# EAGLE board v1 (EAGLE 6.5.0)

Size 101.27 x 80 mm. Coordinates in mm from the lower left corner, seen from the top.
Outline: 0,0 101.27,0 101.27,80 0,80 0,0
Copper layers (1*16): Top 0.035mm / dielectric 1.5mm / Bottom 0.035mm
Design rules "default": minimum track width 10mil, minimum drill 24mil, track to track 8mil, track to pad 8mil, pad to pad 8mil, via to via 8mil, smd to smd 8mil, copper to edge 40mil, drill to drill 8mil, minimum pad ring 10mil, minimum via ring 8mil, stop-mask expansion 4mil, vias tented up to drill 0mil, thermal gap 10mil

## Footprints (pad centres in the part's own frame; a part is rotated, then mirrored left to right if it is on the bottom)
CPOL-RADIAL-100UF-25V = drill 0.7 pad 1.651 square: 1 1.27,0 | drill 0.7 pad 1.651: 2 -1.27,0
ATX24_RIGHT_ANGLE = drill 1.8 pad 2.9: 1 23.1,4.76; 2 18.9,4.76; 3 14.7,4.76; 4 10.5,4.76; 5 6.3,4.76; 6 2.1,4.76; 7 -2.1,4.76; 8 -6.3,4.76; 9 -10.5,4.76; 10 -14.7,4.76; 11 -18.9,4.76; 12 -23.1,4.76; 13 23.1,10.26; 14 18.9,10.26; 15 14.7,10.26; 16 10.5,10.26; 17 6.3,10.26; 18 2.1,10.26; 19 -2.1,10.26; 20 -6.3,10.26; 21 -10.5,10.26; 22 -14.7,10.26; 23 -18.9,10.26; 24 -23.1,10.26 | hole 3: -23.1,-2.54; 23.1,-2.54
POWER_JACK_SLOT = drill 1 pad 2 long: GND@1 2.58,7.5; GND@2 7.58,10.8; PWR 2.58,13.8
SCREWTERMINAL-5MM-2 = drill 1.3 pad 2.032 square: 1 0,0 | drill 1.3 pad 2.032: 2 5,0
LED3MM = drill 0.813 octagon: A -1.27,0; K 1.27,0
AQZ-SIL04 = drill 1 long: 1 -8.89,0; 2 -6.35,0 | drill 1.2 long: 3 3.81,0; 4 8.89,0
DIL06 = drill 0.813 offset: 1 -2.54,-3.81; 2 0,-3.81; 3 2.54,-3.81; 4 2.54,3.81; 5 0,3.81; 6 -2.54,3.81
TO220AH = drill 1.118 long: B -2.54,-6.35; C 0,-6.35; E 2.54,-6.35 | hole 3.302: 0,11.176
ARDUINO_MEGA = drill 1.016 pad 1.88: 0 63.5,50.8; 1 60.96,50.8; 2 58.42,50.8; 3 55.88,50.8; 3.3V 35.56,2.54; 4 53.34,50.8; 5 50.8,50.8; 5V@0 38.1,2.54; 5V@1 93.98,50.8; 5V@2 96.52,50.8; 6 48.26,50.8; 7 45.72,50.8; 8 41.656,50.8; 9 39.116,50.8; 10 36.576,50.8; 11 34.036,50.8; 12 31.496,50.8; 13 28.956,50.8; 14 68.58,50.8; 15 71.12,50.8; 16 73.66,50.8; 17 76.2,50.8; 18 78.74,50.8; 19 81.28,50.8; 20 83.82,50.8; 21 86.36,50.8; A0 50.8,2.54; A1 53.34,2.54; A2 55.88,2.54; A3 58.42,2.54; A4 60.96,2.54; A5 63.5,2.54; A6 66.04,2.54; A7 68.58,2.54; A8 73.66,2.54; A9 76.2,2.54; A10 78.74,2.54; A11 81.28,2.54; A12 83.82,2.54; A13 86.36,2.54; A14 88.9,2.54; A15 91.44,2.54; AREF 23.876,50.8; GND@0 40.64,2.54; GND@1 43.18,2.54; GND@2 93.98,7.62; GND@3 96.52,7.62; GND@4 26.416,50.8; RESET 33.02,2.54; VIN 45.72,2.54 | drill 1.016 pad 1.88 octagon: 22 93.98,48.26; 23 96.52,48.26; 24 93.98,45.72; 25 96.52,45.72; 26 93.98,43.18; 27 96.52,43.18; 28 93.98,40.64; 29 96.52,40.64; 30 93.98,38.1; 31 96.52,38.1; 32 93.98,35.56; 33 96.52,35.56; 34 93.98,33.02; 35 96.52,33.02; 36 93.98,30.48; 37 96.52,30.48; 38 93.98,27.94; 39 96.52,27.94; 40 93.98,25.4; 41 96.52,25.4; 42 93.98,22.86; 43 96.52,22.86; 44 93.98,20.32; 45 96.52,20.32; 46 93.98,17.78; 47 96.52,17.78; 48 93.98,15.24; 49 96.52,15.24; 50 93.98,12.7; 51 96.52,12.7; 52 93.98,10.16; 53 96.52,10.16 | hole 3.2: 15.24,50.8; 13.97,2.54; 66.04,35.56; 66.04,7.62; 90.17,50.8; 96.52,2.54
RJ45-8 = drill 1 pad 1.88 square: 1 -4.445,6.35 | drill 1 pad 1.88: 2 -3.175,8.89; 3 -1.905,6.35; 4 -0.635,8.89; 5 0.635,6.35; 6 1.905,8.89; 7 3.175,6.35; 8 4.445,8.89 | hole 3.2: -5.715,0; 5.715,0

## Placement (x,y rotation side)
C1  [CPOL-RADIAL-100UF-25V]  -48.26,82.55 0 top  (outside the outline)
J1  ATX24RH  [ATX24_RIGHT_ANGLE]  -76.2,-12.7 0 top  (outside the outline)
J2  24VAC  [POWER_JACK_SLOT]  -130.81,-31.75 0 top  (outside the outline)
JP1  M025MM  [SCREWTERMINAL-5MM-2]  -114.3,-29.21 0 top  (outside the outline)
LED1  [LED3MM]  -80.01,81.28 0 top  (outside the outline)
MISTER_RELAY  AQZ202D  [AQZ-SIL04]  -62.23,81.28 0 top  (outside the outline)
OK1  4N37  [DIL06]  -86.36,62.23 0 top  (outside the outline)
OK2  4N37  [DIL06]  -96.52,62.23 0 top  (outside the outline)
OK3  4N37  [DIL06]  -17.78,86.36 0 top  (outside the outline)
OK4  4N37  [DIL06]  -27.94,86.36 0 top  (outside the outline)
OK5  4N37  [DIL06]  -38.1,86.36 0 top  (outside the outline)
Q1  TIP120  [TO220AH]  -19.05,63.5 0 top  (outside the outline)
Q2  TIP120  [TO220AH]  -30.48,63.5 0 top  (outside the outline)
Q3  TIP120  [TO220AH]  -41.91,63.5 0 top  (outside the outline)
Q4  TIP120  [TO220AH]  -53.34,63.5 0 top  (outside the outline)
Q5  TIP120  [TO220AH]  -64.77,63.5 0 top  (outside the outline)
Q6  TIP120  [TO220AH]  -76.2,63.5 0 top  (outside the outline)
U1  ARDUINO-MEGAFULL  [ARDUINO_MEGA]  1.27,17.78 0 top
U$1  RJ45-8PTH  [RJ45-8]  -110.49,-12.7 0 top  (outside the outline)

## Library data of the parts
C1 = SparkFun-Capacitors
J1 J2 JP1 U$1 = SparkFun-Connectors
LED1 = led
MISTER_RELAY = relay; MF: AROMAT/ MATSUSHITA; MPN: AQZ202D; OC_FARNELL: 2053925; OC_NEWARK: 10C4043
OK1-OK5 = optocoupler; MF: FAIRCHILD SEMICONDUCTOR; MPN: 4N37; OC_FARNELL: 1612456; OC_NEWARK: 72K9948
Q1-Q6 = transistor-power
U1 = SparkFun-Boards

## Nets
3V3_MEGA: J1.1 Q6.C U1.3.3V
24VAC: MISTER_RELAY.3
+12VCC: Q5.C
B$1: J1.22 J1.23 OK1.5 OK2.5 OK3.5 OK4.5 OK5.5
B$2: U1.2 U1.3 U1.4 U1.5 U1.6 U1.7 U1.8 U1.9 U$1.1 U$1.2 U$1.3 U$1.4 U$1.5 U$1.6 U$1.7 U$1.8
DEVICE_SUPPLY: Q1.C Q2.C Q3.C Q4.C
GND: C1.2 LED1.K MISTER_RELAY.1 OK1.2 OK1.6 OK2.2 OK2.6 OK3.2 OK3.6 OK4.2 OK4.6 OK5.2 OK5.6 U1.12
N$1: OK1.4 Q1.B
N$2: LED1.A Q6.E
N$3: J1.24
N$4: U1.A0
N$5: J1.19
N$6: J1.18
N$7: U1.22
N$8: U1.5V@2
N$9: OK2.4 Q2.B
N$10: U1.24
N$11: U1.23
N$12: OK3.4 Q3.B
N$13: U1.25
N$14: U1.26
N$15: OK4.4 Q4.B
N$16: U1.27
N$17: U1.28
N$18: OK5.4 Q5.B
N$20: U1.10
N$21: U1.11
N$22: U1.A1
N$23: U1.A2
N$24: U1.A3
N$25: U1.A4
N$26: U1.A5
N$27: U1.A6
N$28: U1.30
N$30: U1.32
N$31: U1.14
N$32: U1.34
N$33: U1.15
N$34: U1.36
N$35: U1.16
N$36: U1.38
N$37: U1.17
N$38: U1.40
N$39: U1.18
N$40: U1.42
N$41: U1.43
N$42: U1.44
N$43: U1.45
N$44: U1.19
N$45: U1.20
N$46: U1.21
N$47: U1.29
N$48: U1.GND@0
N$49: U1.GND@1
N$50: U1.GND@3
N$51: U1.GND@2
N$52: U1.GND@4
N$53: U1.0
N$54: U1.1
N$55: U1.AREF
N$56: J1.21
N$57: J1.4
N$58: J1.6
N$60: J1.2
N$61: J1.13
N$62: J1.10
N$63: J1.11
N$64: J1.14
PIN31: OK1.1 U1.31
PIN33: OK2.1 U1.33
PIN35: OK3.1 U1.35
PIN37: OK4.1 U1.37
PIN39: OK5.1 U1.39
PIN41: MISTER_RELAY.2 U1.41
S_FAN: Q1.E
S_FAN_C: Q2.E
S_IN: C1.1 Q6.B
S_MIST: MISTER_RELAY.4
S_NUTR: Q5.E
S_SOL_DOWN: Q4.E
S_SOL_UP: Q3.E

## Tracks (layer width: path | path; a pad name or v marks a point on that pad's centre or on a via)
3V3_MEGA  (2 unrouted)
B$1  (6 unrouted)
B$2  (15 unrouted)
DEVICE_SUPPLY  (3 unrouted)
GND  (13 unrouted)
N$1  (1 unrouted)
N$2  (1 unrouted)
N$9  (1 unrouted)
N$12  (1 unrouted)
N$15  (1 unrouted)
N$18  (1 unrouted)
PIN31  (1 unrouted)
PIN33  (1 unrouted)
PIN35  (1 unrouted)
PIN37  (1 unrouted)
PIN39  (1 unrouted)
PIN41  (1 unrouted)
S_IN  (1 unrouted)